# Altium PCB model_a.PcbDoc (part 1 of 2)
Units mm, origin at the board's own origin, x right, y up, seen from the top; angles counter-clockwise.
Board outline 65 x 56 mm, 6 copper layers (Top Layer, Ground 1, Supply, Layer 2, Ground 2, Bottom Layer), stack 1.597 mm thick; 97 components, 140 nets, 582 pads, 134 vias.
Unrouted connection lines stored in the file: 357.
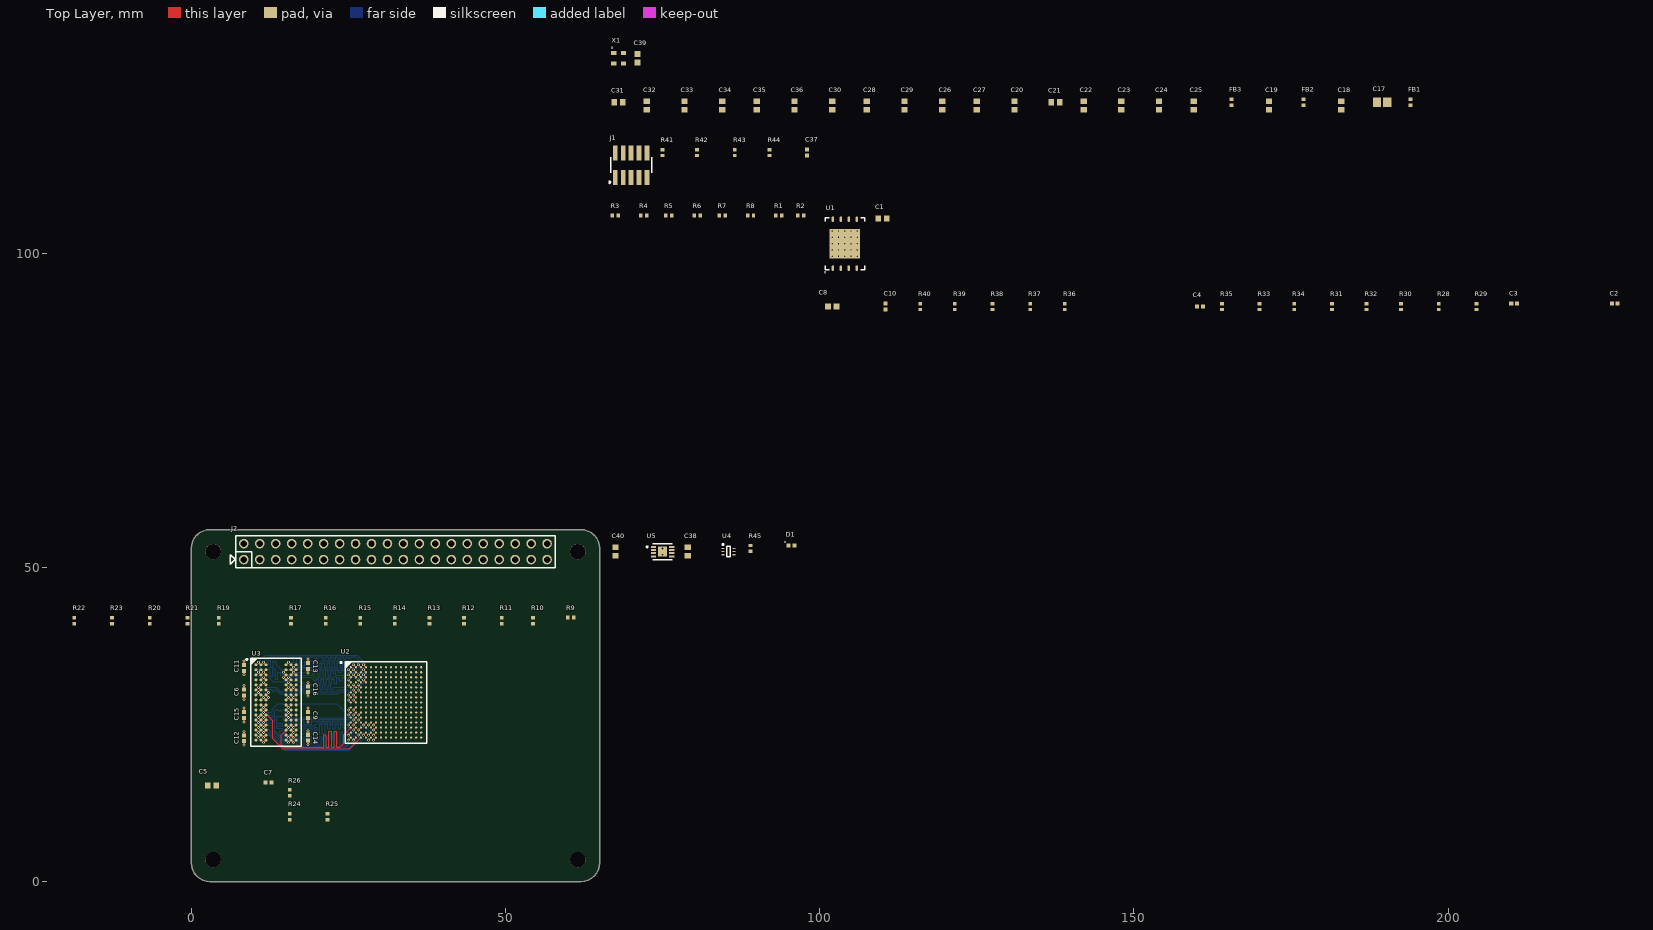
[diagram p0: Top Layer view]
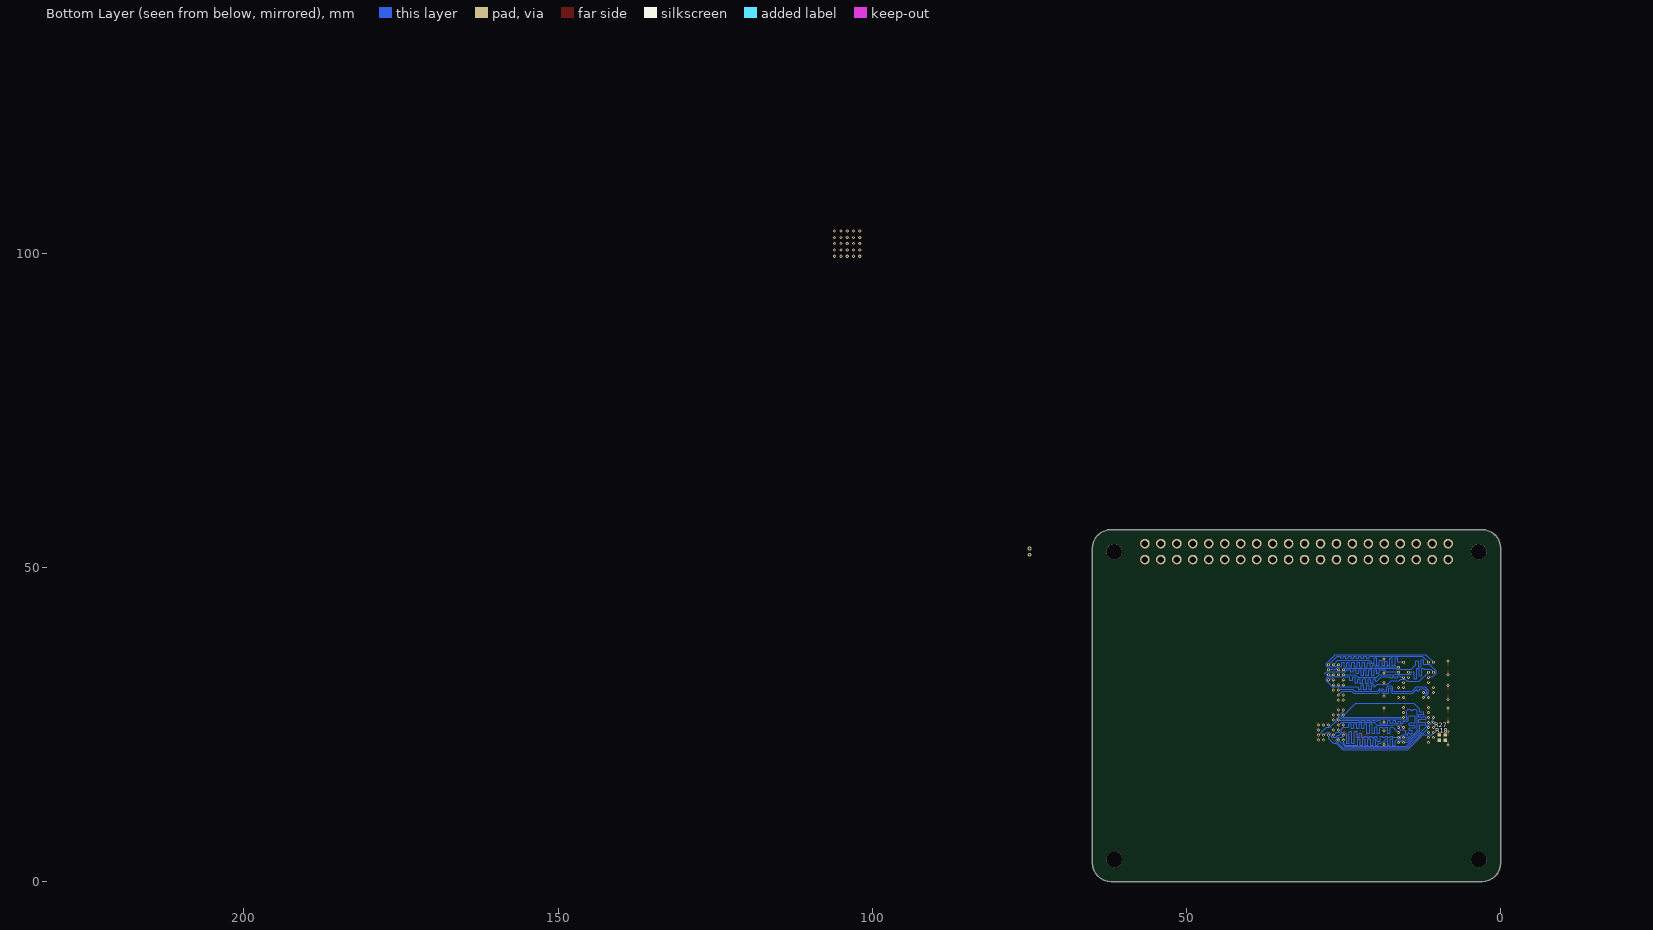
[diagram p1: Bottom Layer view, seen from below]
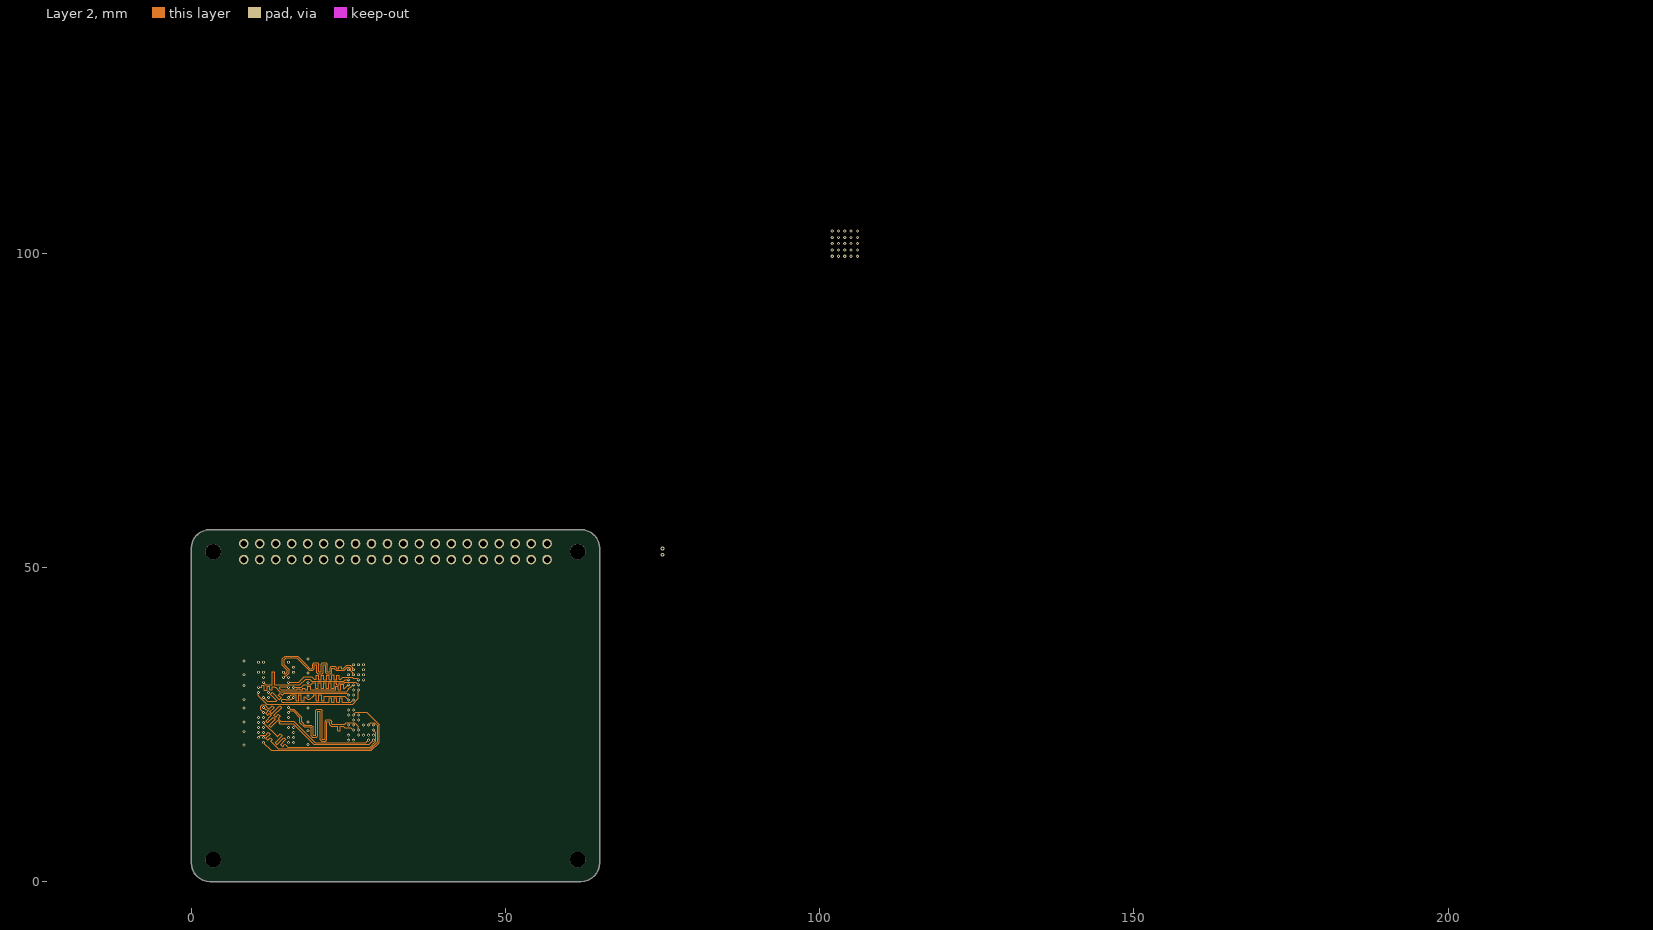
[diagram p2: Layer 2]

## Layer stack, top to bottom
Top Solder: solder mask 0.0203, SM-001, Dk 3.8
Top Layer: signal copper 0.035
Dielectric 4: prepreg 0.1, 2313, Dk 4.25
Ground 1: signal copper 0.0175
Dielectric 2: core 0.565, JLC2313, Dk 4.1
Supply: signal copper 0.0175
Dielectric 1: prepreg 0.127, 2116, Dk 4.05
Layer 2: signal copper 0.0175
Dielectric 3: core 0.565, JLC2313, Dk 4.1
Ground 2: signal copper 0.0175
Dielectric 5: prepreg 0.1, 2313, Dk 4.25
Bottom Layer: signal copper 0.035
Bottom Solder: solder mask 0.0203, SM-001, Dk 3.8

## Board outline
3,56 2.415,55.942 1.852,55.772 1.333,55.494 0.879,55.121 0.506,54.667 0.228,54.148 0.058,53.585 0,53 0,3 0.058,2.415 0.228,1.852 0.506,1.333 0.879,0.879 1.333,0.506 1.852,0.228 2.415,0.058 3,0 62,0 62.585,0.058 63.148,0.228 63.667,0.506 64.121,0.879 64.494,1.333 64.772,1.852 64.942,2.415 65,3 65,53 64.942,53.585 64.772,54.148 64.494,54.667 64.121,55.121 63.667,55.494 63.148,55.772 62.585,55.942 62,56

## Design rules (kind name [scope] priority, off if disabled: settings)
Clearance [All] p1: gap=0.089 ignorepadtopadclearanceinfootprint=FALSE
DiffPairsRouting DiffPairsRouting_DDR_D80 [InDifferentialPairClass('All Differential Pairs') and InNetClass('DDR_Z80')] p1: maxlimit=0.254 minlimit=0.089 mostfreqgap=0.127 toplayer_minwidth=0.089 toplayer_maxwidth=0.381 toplayer_prefwidth=0.174 midlayer1_minwidth=0.089 midlayer1_maxwidth=0.381 midlayer1_prefwidth=0.143 midlayer2_minwidth=0.089 midlayer2_maxwidth=0.381 midlayer2_prefwidth=0.175 midlayer3_minwidth=0.089 midlayer3_maxwidth=0.381 midlayer3_prefwidth=0.175 midlayer4_minwidth=0.089 midlayer4_maxwidth=0.381 midlayer4_prefwidth=0.143 bottomlayer_minwidth=0.089 bottomlayer_maxwidth=0.381 bottomlayer_prefwidth=0.174 impedanceprofiledriven=TRUE impedanceprofileid={D37B1282-675B-4CC8-9B69-EE9E0E3B6E0B} impedanceprofilevalue=80.000000 maxuncoupledlength=12.7
DiffPairsRouting [All] p2: maxlimit=0.254 minlimit=0.254 mostfreqgap=0.254 toplayer_minwidth=0.381 toplayer_maxwidth=0.381 toplayer_prefwidth=0.381 midlayer1_minwidth=0.381 midlayer1_maxwidth=0.381 midlayer1_prefwidth=0.381 midlayer2_minwidth=0.381 midlayer2_maxwidth=0.381 midlayer2_prefwidth=0.381 midlayer3_minwidth=0.381 midlayer3_maxwidth=0.381 midlayer3_prefwidth=0.381 midlayer4_minwidth=0.381 midlayer4_maxwidth=0.381 midlayer4_prefwidth=0.381 bottomlayer_minwidth=0.381 bottomlayer_maxwidth=0.381 bottomlayer_prefwidth=0.381 maxuncoupledlength=12.7
MatchedLengths MatchedLengths_DDR_CLOCKS_STROBES_1 [InxSignalClass('ADDR_PP1_1') OR InxSignalClass('DATA_BL0') OR InxSignalClass('DATA_BL1_1')] p1: tolerance=0.127 checknetsindiffpair=TRUE checkdiffpairvsdiffpair=FALSE checkxsignals=FALSE checkothers=FALSE
MatchedLengths MatchedLengths_DATA_BL1_1 [InxSignalClass('DATA_BL1_1')] p2: tolerance=0.381 checknetsindiffpair=FALSE checkdiffpairvsdiffpair=TRUE checkxsignals=TRUE checkothers=TRUE
MatchedLengths MatchedLengths_DATA_BL0_1 [InxSignalClass('DATA_BL0')] p3: tolerance=0.381 checknetsindiffpair=FALSE checkdiffpairvsdiffpair=TRUE checkxsignals=TRUE checkothers=TRUE
MatchedLengths MatchedLengths_ADDR_PP1_1 [InxSignalClass('ADDR_PP1_1')] p4: tolerance=1.27 checknetsindiffpair=FALSE checkdiffpairvsdiffpair=TRUE checkxsignals=TRUE checkothers=TRUE
MatchedLengths MatchedLengths_DDR_CLOCKS_STROBES [InxSignalClass('ADDR_PP1') OR InxSignalClass('DATA_BL0') OR InxSignalClass('DATA_BL1')] p5: tolerance=0.127 checknetsindiffpair=TRUE checkdiffpairvsdiffpair=FALSE checkxsignals=FALSE checkothers=FALSE
MatchedLengths MatchedLengths_DATA_BL1 [InxSignalClass('DATA_BL1')] p6: tolerance=0.381 checknetsindiffpair=FALSE checkdiffpairvsdiffpair=TRUE checkxsignals=TRUE checkothers=TRUE
MatchedLengths MatchedLengths_DATA_BL0 [InxSignalClass('DATA_BL0')] p7: tolerance=0.381 checknetsindiffpair=FALSE checkdiffpairvsdiffpair=TRUE checkxsignals=TRUE checkothers=TRUE
MatchedLengths MatchedLengths_ADDR_PP1 [InxSignalClass('ADDR_PP1')] p8: tolerance=1.27 checknetsindiffpair=FALSE checkdiffpairvsdiffpair=TRUE checkxsignals=TRUE checkothers=TRUE
MatchedLengths "Schematic Matched Net Lengths_2" [InNetClass('DDR_Z80')] p9: tolerance=0.127 checknetsindiffpair=TRUE checkdiffpairvsdiffpair=FALSE checkxsignals=FALSE checkothers=FALSE
MatchedLengths "Schematic Matched Net Lengths_1" [InNetClass('DDR_LANE_0')] p10: tolerance=25.4 checknetsindiffpair=FALSE checkdiffpairvsdiffpair=TRUE checkxsignals=TRUE checkothers=TRUE usedelayunits=TRUE delaytolerance=15.000000
MatchedLengths "Schematic Matched Net Lengths" [InNetClass('DDR_LANE_1')] p11: tolerance=0.381 checknetsindiffpair=FALSE checkdiffpairvsdiffpair=TRUE checkxsignals=TRUE checkothers=TRUE usedelayunits=TRUE delaytolerance=15.000000
PolygonConnect [All] p1: connectstyle=Relief reliefconductorwidth=0.254 reliefentries=4 polygonreliefangle="90 Angle" airgapwidth=0.254
RoomDefinition ZYNQ [InComponentClass('ZYNQ')] p1: confinementstyle=ConfineIn formatcopy=TRUE lockcomponents=FALSE outline 66.5,129 75,129 75,135.5 66.5,135.5
RoomDefinition FPGA_POWER [InComponentClass('FPGA_POWER')] p2: confinementstyle=ConfineIn formatcopy=TRUE lockcomponents=FALSE outline 66,121.5 198,121.5 198,128 66,128
RoomDefinition FPGA_MISC [InComponentClass('FPGA_MISC')] p3: confinementstyle=ConfineIn formatcopy=TRUE lockcomponents=FALSE outline 66,110.5 102.5,110.5 102.5,120 66,120
RoomDefinition FPGA_MIO [InComponentClass('FPGA_MIO')] p4: confinementstyle=ConfineIn formatcopy=TRUE lockcomponents=FALSE outline 66,96.5 112,96.5 112,109.5 66,109.5
RoomDefinition FPGA_DDR3L [InComponentClass('FPGA_DDR3L')] p5: confinementstyle=ConfineIn formatcopy=TRUE lockcomponents=FALSE outline 66,77 333.999,77 333.999,95.5 66,95.5
RoomDefinition FPGA_BANK34 [InComponentClass('FPGA_BANK34')] p6: confinementstyle=ConfineIn formatcopy=TRUE lockcomponents=FALSE outline 66,58 81.5,58 81.5,75.5 66,75.5
RoomDefinition connectors [InComponentClass('connectors')] p7: confinementstyle=ConfineIn formatcopy=TRUE lockcomponents=FALSE outline 66.5,2 104,2 104,57 66.5,57
RoutingTopology RoutingTopology_DDRAddressAndControls [InNetClass('DDR_AddressAndControls')] p1: topology=Daisy_Simple
RoutingTopology [All] p2: topology=Shortest
RoutingVias [All] p1: holewidth=0.2 width=0.46 viastyle="Through Hole" minholewidth=0.2 minwidth=0.46 maxholewidth=0.5 maxwidth=1
SolderMaskExpansion [All] p1: expansion=0.102 istentingtop=FALSE
Width Width_DDR_S40 [InNetClass('DDR_Z40')] p1: maxlimit=0.254 minlimit=0.089 preferedwidth=0.169 toplayer_prefwidth=0.158 midlayer1_prefwidth=0.128 midlayer4_prefwidth=0.128 bottomlayer_prefwidth=0.158 impedanceprofiledriven=TRUE impedanceprofileid={D11805BC-751B-4782-8DA5-E56B2B436CBE} impedanceprofilevalue=50.000000 minimp=50.000000 maximp=50.000000 favimp=50.000000
Width [All] p2: maxlimit=0.254 minlimit=0.089 preferedwidth=0.102
28 further rules are at their usual default settings.

## Classes and differential pairs
net class DDR_AddressAndControls: A0 A1 A2 A3 A4 A5 A6 A7 A8 A9 A10 A11 A12 A13 A14 BA0 BA1 BA2 CAS CK_N CK_P CS ODT RAS WE
net class GPIO[0..21]: GPIO0 GPIO1 GPIO2 GPIO3 GPIO4 GPIO5 GPIO6 GPIO7 GPIO8 GPIO9 GPIO10 GPIO11 GPIO12 GPIO13 GPIO14 GPIO15 GPIO16 GPIO17 GPIO18 GPIO19 GPIO20 GPIO21
net class DDR_Z80: CK_N CK_P DQS0_N DQS0_P DQS1_N DQS1_P
net class DDR_Z40: A0 A1 A2 A3 A4 A5 A6 A7 A8 A9 A10 A11 A12 A13 A14 BA0 BA1 BA2 CAS DM0 DM1 DQ0 DQ1 DQ2 DQ3 DQ4 DQ5 DQ6 DQ7 DQ8 DQ9 DQ10 DQ11 DQ12 DQ13 DQ14 DQ15 DRST ODT RAS WE
net class DDR_LANE_1: DM1 DQ8 DQ9 DQ10 DQ11 DQ12 DQ13 DQ14 DQ15 DQS1_N DQS1_P
net class DDR_LANE_0: DM0 DQ0 DQ1 DQ2 DQ3 DQ4 DQ5 DQ6 DQ7 DQS0_N DQS0_P
net class DDR_CTRL: A0 A1 A2 A3 A4 A5 A6 A7 A8 A9 A10 A11 A12 A13 A14 BA0 BA1 BA2 CAS CK_N CK_P DRST ODT RAS WE
component class ZYNQ: C39 X1
component class FPGA_POWER: C17 C18 C19 C20 C21 C22 C23 C24 C25 C26 C27 C28 C29 C30 C31 C32 C33 C34 C35 C36 FB1 FB2 FB3
component class FPGA_MISC: C37 J1 R41 R42 R43 R44
component class FPGA_MIO: C1 R1 R2 R3 R4 R5 R6 R7 R8 U1
component class FPGA_DDR3L: C2 C3 C4 C5 C6 C7 C8 C9 C10 C11 C12 C13 C14 C15 C16 R9 R10 R11 R12 R13 R14 R15 R16 R17 R18 R19 R20 R21 R22 R23 R24 R25 R26 R27 R28 R29 R30 R31 R32 R33 R34 R35 R36 R37 R38 R39 R40 U3
component class FPGA_BANK34: U2
component class connectors: C38 C40 D1 J2 R45 U4 U5
differential pair IO_L5: +IO_L5_P -IO_L5_N
differential pair IO_L3: +IO_L3_P -IO_L3_N
differential pair IO_L2: +IO_L2_P -IO_L2_N
differential pair IO_L1: +IO_L1_P -IO_L1_N
differential pair DQS1: +DQS1_P -DQS1_N
differential pair DQS0: +DQS0_P -DQS0_N
differential pair CK: +CK_P -CK_N

## Components (designator, comment, footprint, x,y, rotation, side; value= is the part's Value field where it differs from the comment)
C1 "cap" CAPC1608X08N 110,105.5 r0 top value=470n
C2 "cap" CAPC1005X06N 226.5,92 r0 top value=100n
C3 "cap" CAPC1005X06N 210.5,92 r0 top value=100n
C4 "cap" CAPC1005X06N 160.5,91.5 r0 top value=470n
C5 "cap" CAPC1608X08N 3.3,15.3 r0 top value=4u7
C6 "cap" CAPC1005X06N 8.4,30.1 r90 top value=470n
C7 "cap" CAPC1005X06N 12.3,15.8 r0 top value=100n
C8 "cap" CAPC1608X08N 102,91.5 r0 top value=4u7
C9 "cap" CAPC1005X06N 18.6,26.5 r90 top value=470n
C10 "cap" CAPC1005X06N 110.5,91.5 r90 top value=100n
C11 "cap" CAPC1005X06N 8.4,34 r90 top value=470n
C12 "cap" CAPC1005X06N 8.4,22.8 r90 top value=470n
C13 "cap" CAPC1005X06N 18.6,34.3 r90 top value=470n
C14 "cap" CAPC1005X06N 18.6,22.9 r90 top value=470n
C15 "cap" CAPC1005X06N 8.4,26.5 r90 top value=470n
C16 "cap" CAPC1005X06N 18.6,30.6 r90 top value=470n
C17 "cap" CAPC2012X11N 189.5,124 r0 top value=100n
C18 "cap" CAPC1608X08N 183,123.5 r90 top value=470n
C19 "cap" CAPC1608X08N 171.5,123.5 r90 top value=470n
C20 "cap" CAPC1608X08N 131,123.5 r90 top value=470n
C21 "cap" CAPC1608X08N 137.5,124 r0 top value=470n
C22 "cap" CAPC1608X08N 142,123.5 r90 top value=470n
C23 "cap" CAPC1608X08N 148,123.5 r90 top value=470n
C24 "cap" CAPC1608X08N 154,123.5 r90 top value=470n
C25 "cap" CAPC1608X08N 159.5,123.5 r90 top value=470n
C26 "cap" CAPC1608X08N 119.5,123.5 r90 top value=470n
C27 "cap" CAPC1608X08N 125,123.5 r90 top value=470n
C28 "cap" CAPC1608X08N 107.5,123.5 r90 top value=470n
C29 "cap" CAPC1608X08N 113.5,123.5 r90 top value=470n
C30 "cap" CAPC1608X08N 102,123.5 r90 top value=470n
C31 "cap" CAPC1608X08N 68,124 r0 top value=470n
C32 "cap" CAPC1608X08N 72.5,123.5 r90 top value=470n
C33 "cap" CAPC1608X08N 78.5,123.5 r90 top value=470n
C34 "cap" CAPC1608X08N 84.5,123.5 r90 top value=470n
C35 "cap" CAPC1608X08N 90,123.5 r90 top value=470n
C36 "cap" CAPC1608X08N 96,123.5 r90 top value=470n
C37 "cap" CAPC1005X06N 98,116 r90 top value=100n
C38 "cap" CAPC1608X08N 79,52.5 r90 top value=470n
C39 "cap" CAPC1608X08N 71,131 r90 top value=470n
C40 "cap" CAPC1608X08N 67.5,52.5 r90 top value=470n
D1 "led" CAPCP1005X06N 95.5,53.5 r0 top value=RED
FB1 "ferrite" INDC1005X06N 194,124 r90 top value=100R
FB2 "ferrite" INDC1005X06N 177,124 r90 top value=100R
FB3 "ferrite" INDC1005X06N 165.5,124 r90 top value=100R
J1 "SWD" hdr_2x5_50mil 70,114 r0 top
J2 "Raspberry PI" raspi_male_con 32.5,52.5 r0 top locked
R1 "res" RESC1005X04N 93.5,106 r0 top value=10K
R2 "res" RESC1005X04N 97,106 r0 top value=10K
R3 "res" RESC1005X04N 67.5,106 r0 top value=10K
R4 "res" RESC1005X04N 72,106 r0 top value=10K
R5 "res" RESC1005X04N 76,106 r0 top value=10K
R6 "res" RESC1005X04N 80.5,106 r0 top value=10K
R7 "res" RESC1005X04N 84.5,106 r0 top value=10K
R8 "res" RESC1005X04N 89,106 r0 top value=10K
R9 "res" RESC1005X04N 60.399,42 r0 top value=40R2
R10 "res" RESC1005X04N 54.399,41.5 r90 top value=40R2
R11 "res" RESC1005X04N 49.399,41.5 r90 top value=40R2
R12 "res" RESC1005X04N 43.399,41.5 r90 top value=40R2
R13 "res" RESC1005X04N 37.899,41.5 r90 top value=40R2
R14 "res" RESC1005X04N 32.399,41.5 r90 top value=40R2
R15 "res" RESC1005X04N 26.899,41.5 r90 top value=40R2
R16 "res" RESC1005X04N 21.399,41.5 r90 top value=40R2
R17 "res" RESC1005X04N 15.899,41.5 r90 top value=40R2
R18 "res" RESC1005X04N 9.3,22.5 r180 bottom value=40R2
R19 "res" RESC1005X04N 4.399,41.5 r90 top value=240R
R20 "res" RESC1005X04N -6.601,41.5 r90 top value=10K
R21 "res" RESC1005X04N -0.601,41.5 r90 top value=40R2
R22 "res" RESC1005X04N -18.601,41.5 r90 top value=10K
R23 "res" RESC1005X04N -12.601,41.5 r90 top value=40R2
R24 "res" RESC1005X04N 15.7,10.325 r90 top value=40R2
R25 "res" RESC1005X04N 21.7,10.325 r90 top value=40R2
R26 "res" RESC1005X04N 15.7,14.125 r90 top value=40R2
R27 "res" RESC1005X04N 9.3,23.4 r180 bottom value=40R2
R28 "res" RESC1005X04N 198.5,91.5 r90 top value=40R2
R29 "res" RESC1005X04N 204.5,91.5 r90 top value=40R2
R30 "res" RESC1005X04N 192.5,91.5 r90 top value=4K7
R31 "res" RESC1005X04N 181.5,91.5 r90 top value=40R2
R32 "res" RESC1005X04N 187,91.5 r90 top value=40R2
R33 "res" RESC1005X04N 170,91.5 r90 top value=4K7
R34 "res" RESC1005X04N 175.5,91.5 r90 top value=40R2
R35 "res" RESC1005X04N 164,91.5 r90 top value=4K7
R36 "res" RESC1005X04N 139,91.5 r90 top value=40R2
R37 "res" RESC1005X04N 133.5,91.5 r90 top value=40R2
R38 "res" RESC1005X04N 127.5,91.5 r90 top value=40R2
R39 "res" RESC1005X04N 121.5,91.5 r90 top value=80R6
R40 "res" RESC1005X04N 116,91.5 r90 top value=40R2
R41 "res" RESC1005X04N 75,116 r90 top value=10K
R42 "res" RESC1005X04N 80.5,116 r90 top value=10K
R43 "res" RESC1005X04N 86.5,116 r90 top value=10K
R44 "res" RESC1005X04N 92,116 r90 top value=10K
R45 "res" RESC1005X04N 89,53 r90 top value=10K
U1 "S25FL128SAGNFI001" SPSN-WSON-8_N 104,101.5 r90 top
U2 "XC7Z010-1CLG225I" CLG225 31,28.5 r0 top
U3 "MT41K256M16TW-107 XIT:P" MICT-TW-96 13.5,28.5 r0 top locked
U4 "TMP102AIDRLT" DRL0006A_L 85.5,52.5 r0 top
U5 "ATSHA204A-MAHDA-T" FP-C04-21355-Q4B-MFG 75,52.5 r0 top
X1 "DSC1001DI2" DFN165P200X90-4N_DSC1001DIx 68,131 r0 top

## Footprints (in the part's own frame and the unit in brackets; to place one, negate y for a bottom-side part, rotate by r counter-clockwise, add the part's x,y. Pads: shape width x height; smd on the part's side, far side on the other; paste and mask are expansions set on the pad)
CAPC1005X06N [mm] "Chip Capacitor, 2-Leads, Body 1.00x0.50mm, IPC Medium Density"
  rect 0.64x0.64 smd: 1(-0.46,0) 2(0.46,0)
  body extent -0.55,-0.3 0.55,0.3, height 0.6
CAPC1608X08N [mm] "Chip Capacitor, 2-Leads, Body 1.60x0.80mm, IPC Medium Density"
  rect 0.9x1 smd: 1(-0.675,0) 2(0.675,0)
  body extent -0.87,-0.48 0.87,0.48, height 0.85
CAPC2012X11N [mm] "Chip Capacitor, 2-Leads, Body 2.00x1.25mm, IPC Medium Density"
  rect 1.3x1.45 smd: 1(-0.8,0) 2(0.8,0)
  body extent -1.1,-0.72 1.1,0.72, height 1.1
CAPCP1005X06N [mm] "Chip Capacitor, 2-Leads, Body 1.00x0.50mm, IPC Medium Density"
  rect 0.64x0.64 smd: 1(-0.46,0) 2(0.46,0)
  silkscreen extent -1.04,0.48 -0.94,0.58, body extent -0.5,-0.25 0.5,0.25, height 0.5
CLG225 [mm] "BGA, 225-Balls, Body 13x13mm, Pitch 0.8mm"
  round 0.35 smd: A1(-5.6,5.6) A2(-4.8,5.6) A3(-4,5.6) A4(-3.2,5.6) A5(-2.4,5.6) A6(-1.6,5.6) A7(-0.8,5.6) A8(0,5.6) A9(0.8,5.6) A10(1.6,5.6) A11(2.4,5.6) A12(3.2,5.6) A13(4,5.6) A14(4.8,5.6) A15(5.6,5.6) B1(-5.6,4.8) B2(-4.8,4.8) B3(-4,4.8) B4(-3.2,4.8) B5(-2.4,4.8) B6(-1.6,4.8) B7(-0.8,4.8) B8(0,4.8) B9(0.8,4.8) B10(1.6,4.8) B11(2.4,4.8) B12(3.2,4.8) B13(4,4.8) B14(4.8,4.8) B15(5.6,4.8) C1(-5.6,4) C2(-4.8,4) C3(-4,4) C4(-3.2,4) C5(-2.4,4) C6(-1.6,4) C7(-0.8,4) C8(0,4) C9(0.8,4) C10(1.6,4) C11(2.4,4) C12(3.2,4) C13(4,4) C14(4.8,4) C15(5.6,4) D1(-5.6,3.2) D2(-4.8,3.2) D3(-4,3.2) D4(-3.2,3.2) D5(-2.4,3.2) D6(-1.6,3.2) D7(-0.8,3.2) D8(0,3.2) D9(0.8,3.2) D10(1.6,3.2) D11(2.4,3.2) D12(3.2,3.2) D13(4,3.2) D14(4.8,3.2) D15(5.6,3.2) E1(-5.6,2.4) E2(-4.8,2.4) E3(-4,2.4) E4(-3.2,2.4) E5(-2.4,2.4) E6(-1.6,2.4) E7(-0.8,2.4) E8(0,2.4) E9(0.8,2.4) E10(1.6,2.4) E11(2.4,2.4) E12(3.2,2.4) E13(4,2.4) E14(4.8,2.4) E15(5.6,2.4) F1(-5.6,1.6) F2(-4.8,1.6) F3(-4,1.6) F4(-3.2,1.6) F5(-2.4,1.6) F6(-1.6,1.6) F7(-0.8,1.6) F8(0,1.6) F9(0.8,1.6) F10(1.6,1.6) F11(2.4,1.6) F12(3.2,1.6) F13(4,1.6) F14(4.8,1.6) F15(5.6,1.6) G1(-5.6,0.8) G2(-4.8,0.8) G3(-4,0.8) G4(-3.2,0.8) G5(-2.4,0.8) G6(-1.6,0.8) G7(-0.8,0.8) G8(0,0.8) G9(0.8,0.8) G10(1.6,0.8) G11(2.4,0.8) G12(3.2,0.8) G13(4,0.8) G14(4.8,0.8) G15(5.6,0.8) H1(-5.6,0) H2(-4.8,0) H3(-4,0) H4(-3.2,0) H5(-2.4,0) H6(-1.6,0) H7(-0.8,0) H8(0,0) H9(0.8,0) H10(1.6,0) H11(2.4,0) H12(3.2,0) H13(4,0) H14(4.8,0) H15(5.6,0) J1(-5.6,-0.8) J2(-4.8,-0.8) J3(-4,-0.8) J4(-3.2,-0.8) J5(-2.4,-0.8) J6(-1.6,-0.8) J7(-0.8,-0.8) J8(0,-0.8) J9(0.8,-0.8) J10(1.6,-0.8) J11(2.4,-0.8) J12(3.2,-0.8) J13(4,-0.8) J14(4.8,-0.8) J15(5.6,-0.8) K1(-5.6,-1.6) K2(-4.8,-1.6) K3(-4,-1.6) K4(-3.2,-1.6) K5(-2.4,-1.6) K6(-1.6,-1.6) K7(-0.8,-1.6) K8(0,-1.6) K9(0.8,-1.6) K10(1.6,-1.6) K11(2.4,-1.6) K12(3.2,-1.6) K13(4,-1.6) K14(4.8,-1.6) K15(5.6,-1.6) L1(-5.6,-2.4) L2(-4.8,-2.4) L3(-4,-2.4) L4(-3.2,-2.4) L5(-2.4,-2.4) L6(-1.6,-2.4) L7(-0.8,-2.4) L8(0,-2.4) L9(0.8,-2.4) L10(1.6,-2.4) L11(2.4,-2.4) L12(3.2,-2.4) L13(4,-2.4) L14(4.8,-2.4) L15(5.6,-2.4) M1(-5.6,-3.2) M2(-4.8,-3.2) M3(-4,-3.2) M4(-3.2,-3.2) M5(-2.4,-3.2) M6(-1.6,-3.2) M7(-0.8,-3.2) M8(0,-3.2) M9(0.8,-3.2) M10(1.6,-3.2) M11(2.4,-3.2) M12(3.2,-3.2) M13(4,-3.2) M14(4.8,-3.2) M15(5.6,-3.2) N1(-5.6,-4) N2(-4.8,-4) N3(-4,-4) N4(-3.2,-4) N5(-2.4,-4) N6(-1.6,-4) N7(-0.8,-4) N8(0,-4) N9(0.8,-4) N10(1.6,-4) N11(2.4,-4) N12(3.2,-4) N13(4,-4) N14(4.8,-4) N15(5.6,-4) P1(-5.6,-4.8) P2(-4.8,-4.8) P3(-4,-4.8) P4(-3.2,-4.8) P5(-2.4,-4.8) P6(-1.6,-4.8) P7(-0.8,-4.8) P8(0,-4.8) P9(0.8,-4.8) P10(1.6,-4.8) P11(2.4,-4.8) P12(3.2,-4.8) P13(4,-4.8) P14(4.8,-4.8) P15(5.6,-4.8) R1(-5.6,-5.6) R2(-4.8,-5.6) R3(-4,-5.6) R4(-3.2,-5.6) R5(-2.4,-5.6) R6(-1.6,-5.6) R7(-0.8,-5.6) R8(0,-5.6) R9(0.8,-5.6) R10(1.6,-5.6) R11(2.4,-5.6) R12(3.2,-5.6) R13(4,-5.6) R14(4.8,-5.6) R15(5.6,-5.6)
  silkscreen extent -7.27,-6.5 6.5,6.5, body extent -6.5,-6.5 6.5,6.5, height 1.5
DFN165P200X90-4N_DSC1001DIx [mm] "DFN, 4-Leads, Body 2.50x2.00mm, Pitch 1.65mm, IPC Medium Density"
  rect 0.85x0.65 smd: 1(-0.775,0.825) 2(-0.775,-0.825) 3(0.775,-0.825) 4(0.775,0.825)
  silkscreen extent -1.07,1.63 -0.97,1.72, body extent -1.02,-1.27 1.02,1.27, height 0.9
DRL0006A_L [mm] "SOT23, 6-Leads, Body 1.7x1.3mm, Pitch 0.5mm, IPC High Density"
  rrect50% 0.45x0.2 smd: 1(-0.875,0.5) 2(-0.875,0) 3(-0.875,-0.5) 4(0.875,-0.5) 5(0.875,0) 6(0.875,0.5)
  silkscreen extent -1,-0.85 0.25,1.27, body extent -0.65,-0.85 0.65,0.85, height 0.6
FP-C04-21355-Q4B-MFG [mm]
  rect 0.85x0.3 smd paste+0 mask+0: 1(-1.45,0.75) 2(-1.45,0.25) 3(-1.45,-0.25) 4(-1.45,-0.75) 5(1.45,-0.75) 6(1.45,-0.25) 7(1.45,0.25) 8(1.45,0.75)
  rect 1.4x1.6 smd paste+0 mask+0: 9(0,0)
  silkscreen extent -2.57,-1.27 1.55,1.27, body extent -1.97,-1.15 1.97,1.15, height 0.25
hdr_2x5_50mil [mm] "2x5 Pin header, 50mil pitch"
  rect 0.76x2.4 smd: 1(-2.54,-1.95) 2(-2.54,1.95) 2(-2.54,1.95) 3(-1.27,-1.95) 4(-1.27,1.95) 5(0,-1.95) 6(0,1.95) 7(1.27,-1.95) 8(1.27,1.95) 9(2.54,-1.95) 10(2.54,1.95)
  silkscreen extent -3.5,-3 3.25,1.25, body extent -3.17,-2.75 3.18,2.75, height 4.5
INDC1005X06N [mm] "Chip Inductor, 2-Leads, Body 1.00x0.50mm, IPC Medium Density"
  rect 0.58x0.64 smd: 1(-0.49,0) 2(0.49,0)
  body extent -0.55,-0.3 0.55,0.3, height 0.6
MICT-TW-96 [mm] "BGA, 96-Balls, Body 8x14mm, Pitch 0.8mm"
  round 0.47 smd mask-0.025: A1(-3.2,6) A2(-2.4,6) A3(-1.6,6) A7(1.6,6) A8(2.4,6) A9(3.2,6) B1(-3.2,5.2) B2(-2.4,5.2) B3(-1.6,5.2) B7(1.6,5.2) B8(2.4,5.2) B9(3.2,5.2) C1(-3.2,4.4) C2(-2.4,4.4) C3(-1.6,4.4) C7(1.6,4.4) C8(2.4,4.4) C9(3.2,4.4) D1(-3.2,3.6) D2(-2.4,3.6) D3(-1.6,3.6) D7(1.6,3.6) D8(2.4,3.6) D9(3.2,3.6) E1(-3.2,2.8) E2(-2.4,2.8) E3(-1.6,2.8) E7(1.6,2.8) E8(2.4,2.8) E9(3.2,2.8) F1(-3.2,2) F2(-2.4,2) F3(-1.6,2) F7(1.6,2) F8(2.4,2) F9(3.2,2) G1(-3.2,1.2) G2(-2.4,1.2) G3(-1.6,1.2) G7(1.6,1.2) G8(2.4,1.2) G9(3.2,1.2) H1(-3.2,0.4) H2(-2.4,0.4) H3(-1.6,0.4) H7(1.6,0.4) H8(2.4,0.4) H9(3.2,0.4) J1(-3.2,-0.4) J2(-2.4,-0.4) J3(-1.6,-0.4) J7(1.6,-0.4) J8(2.4,-0.4) J9(3.2,-0.4) K1(-3.2,-1.2) K2(-2.4,-1.2) K3(-1.6,-1.2) K7(1.6,-1.2) K8(2.4,-1.2) K9(3.2,-1.2) L1(-3.2,-2) L2(-2.4,-2) L3(-1.6,-2) L7(1.6,-2) L8(2.4,-2) L9(3.2,-2) M1(-3.2,-2.8) M2(-2.4,-2.8) M3(-1.6,-2.8) M7(1.6,-2.8) M8(2.4,-2.8) M9(3.2,-2.8) N1(-3.2,-3.6) N2(-2.4,-3.6) N3(-1.6,-3.6) N7(1.6,-3.6) N8(2.4,-3.6) N9(3.2,-3.6) P1(-3.2,-4.4) P2(-2.4,-4.4) P3(-1.6,-4.4) P7(1.6,-4.4) P8(2.4,-4.4) P9(3.2,-4.4) R1(-3.2,-5.2) R2(-2.4,-5.2) R3(-1.6,-5.2) R7(1.6,-5.2) R8(2.4,-5.2) R9(3.2,-5.2) T1(-3.2,-6) T2(-2.4,-6) T3(-1.6,-6) T7(1.6,-6) T8(2.4,-6) T9(3.2,-6)
  silkscreen extent -4.77,-7 4,7, body extent -4,-7 4,7, height 1.2
raspi_male_con [mil]
  round 60 hole 40: 1(-950,-50) 2(-950,50) 3(-850,-50) 4(-850,50) 5(-750,-50) 6(-750,50) 7(-650,-50) 8(-650,50) 9(-550,-50) 10(-550,50) 11(-450,-50) 12(-450,50) 13(-350,-50) 14(-350,50) 15(-250,-50) 16(-250,50) 17(-150,-50) 18(-150,50) 19(-50,-50) 20(-50,50) 21(50,-50) 22(50,50) 23(150,-50) 24(150,50) 25(250,-50) 26(250,50) 27(350,-50) 28(350,50) 29(450,-50) 30(450,50) 31(550,-50) 32(550,50) 33(650,-50) 34(650,50) 35(750,-50) 36(750,50) 37(850,-50) 38(850,50) 39(950,-50) 40(950,50)
  silkscreen extent -1033,-100 1000,100, body extent -1000,-100 1000,100, height 330
RESC1005X04N [mm] "Chip Resistor, 2-Leads, Body 1.05x0.54mm, IPC Medium Density"
  rect 0.55x0.6 smd: 1(-0.475,0) 2(0.475,0)
  body extent -0.55,-0.3 0.55,0.3, height 0.4
SPSN-WSON-8_N [mm] "SON, 8-Leads, Body 6.00x8.00mm, Pitch 1.27mm, Thermal Pad 4.80x4.65mm, IPC Medium Density"
  oval 0.9x0.4 smd: 1(-3.89,1.905) 2(-3.89,0.635) 3(-3.89,-0.635) 4(-3.89,-1.905) 5(3.89,-1.905) 6(3.89,-0.635) 7(3.89,0.635) 8(3.89,1.905)
  rect 4.65x4.8 smd paste-3: 9(0,0)
  silkscreen extent -4.6,-3.15 4.15,3.2, body extent -4,-3 4,3, height 0.8

## Part data
C1 C2 C3 C4 C5 C6 C7 C8 C9 C10 C11 C12 C13 C14 C15 C16 C17 C18 C19 C20 C21 C22 C23 C24 C25 C26 C27 C28 C29 C30 C31 C32 C33 C34 C35 C36 C37 C38 C39 C40: "Capacitor"
D1: "LED"
FB1 FB2 FB3: "Inductor"
J1: library part hdr_swd, "SWD Header"
J2: library part raspberry_2x20_con, "Raspberry PI 2x20 connector"
R1 R2 R3 R4 R5 R6 R7 R8 R9 R10 R11 R12 R13 R14 R15 R16 R17 R18 R19 R20 R21 R22 R23 R24 R25 R26 R27 R28 R29 R30 R31 R32 R33 R34 R35 R36 R37 R38 R39 R40 R41 R42 R43 R44 R45: "Resistor"
U1: library part CMP-1329-00028-1, "MirrorBit Flash Non-Volatile Memory CMOS 3.0 Volt Core with Versatile I/O, Serial Peripheral Interface with Multi-I/O, 128 Mbit, 133 MHz, -40 to 85 degC, 8-Pin WSON (WNG008), RoHS, Tube", Manufacturer=Spansion, Temperature Range="-40 to 85 degC", ComponentLink1Description="Manufacturer URL", ComponentLink1URL=http://www.spansion.com/Pages/Default.aspx, ComponentLink2Description=Datasheet, ComponentLink2URL=http://www.spansion.com/Support/Datasheets/S25FL128S_256S_00.pdf, ComponentLink3Description="Package Specification", ComponentLink3URL=http://www.spansion.com/Support/Datasheets/S25FL128S_256S_00.pdf, DatasheetVersion="Rev. 08", Density="128 Mbit", Mounting Technology="Surface Mount", OTP="1024 B", PackageDescription="8-Pin Plastic Small Outline, Body 6 x 8 mm, Pitch 1.27 mm", Packing=Tube, PartNumber=S25FL128SAGNFI001, RoHS=TRUE, Speed="133 MHz", VCC="2.7 to 3.6 V"
U2: library part CMP-0382-00001-1, "667 MHz Zynq™-7000 AP SoC, 88 PS I/O, 54 FPGA I/O, 225-Ball BGA, Speed Grade 1, Industrial Grade, Pb-Free", Generic Part Number=XC7Z010, Code_JEDEC=MO-275-HHAC-1, ComponentLink1Description=Datasheet, ComponentLink1URL=http://www.xilinx.com/support/documentation/data_sheets/ds190-Zynq-7000-Overview.pdf, ComponentLink2Description="Package Specification", ComponentLink2URL=http://www.xilinx.com/support/documentation/user_guides/ug865-Zynq-7000-Pkg-Pinout.pdf, ComponentLink3Description="DC and AC Switching Characteristics", ComponentLink3URL=http://www.xilinx.com/support/documentation/data_sheets/ds187-XC7Z010-XC7Z020-Data-Sheet.pdf, ComponentLink4Description="Package File", ComponentLink4URL=http://www.xilinx.com/support/packagefiles/z7packages/xc7z010clg225pkg.txt, ComponentLink5Description="Packaging and Pinout", ComponentLink5URL=http://www.xilinx.com/support/documentation/user_guides/ug865-Zynq-7000-Pkg-Pinout.pdf, ComponentLink6Description="PCB and Layout Guide", ComponentLink6URL=http://www.xilinx.com/support/documentation/user_guides/ug483_7Series_PCB.pdf, DatasheetVersion=v1.2, Extensible Block RAM (# 36Kb Blocks)="240 KB (60)", Flip Flops=35200, LUTs=17600, Mounting Technology="Surface Mount", PackageDescription="Wire-Bond Chip-Scale BGA, Body 13 x 13 mm, 0.8 mm Pitch", PackageReference=CLG225, PackageVersion="Rev 1.2, 02/2013", PartNumber=XC7Z010-1CLG225I, RoHS=Pb-Free, Speed Grade=-1
U3: library part CMP-2000-07474-1, "DDR3L SDRAM, 4 GB, 933 MHz, 1.283 to 1.45 V, -40 to 95 degC, 96-Pin FBGA, RoHs, Tray", Case\/Package=TFBGA, Frequency=933MHz, Manufacturer=Micron, Max Operating Temperature=95degC, Min Operating Temperature=-40degC, Package Description="96-Ball Fine Pitch Ball Grid Array, Body 14 x 8 mm, Pitch 0.8 mm", Package Reference=TW-96, Access Time=1.07ns, Address Bus Width=15b, Contact Plating=Silver, Data Bus Width=16b, Datasheet URL=https://www.micron.com/~/media/documents/products/data-sheet/dram/ddr3/4gb_1_35v_ddr3l_xit_addendum.pdf, Datasheet Version="Rev. A, 02/2016", Density=4Gb, Interface=Parallel, Manufacturer URL=http://www.micron.com/, Max Frequency=933MHz, Memory Type=RAM, Mount=SurfaceMount, Mounting Technology=SurfaceMount, Packaging=Tray, RoHSCompliant=true
U4: library part CMP-1685-00013-1, "Low Power Digital Temperature Sensor with SMBus and Two-Wire Serial Interface, 1.4 to 3.6 V, -40 to 125 degC, 6-Pin SOT (DRL), Green (RoHS & no Sb/Br), Tape and Reel", Address=0x90, ComponentLink1Description="Manufacturer URL", ComponentLink1URL=http://www.ti.com/, ComponentLink2Description=Datasheet, ComponentLink2URL=http://www.ti.com/lit/ds/symlink/tmp102.pdf, ComponentLink3Description="Package Specification", ComponentLink3URL=http://www.ti.com/lit/ml/mpds159c/mpds159c.pdf, DatasheetVersion="SBOS397F, 12/2015", PackageDescription="6-Pin Plastic Small Outline, Body 1.6 x 1.2 mm, Pitch 0.5 mm", PackageReference=DRL0006A, PackageVersion="4205622-3/D, 08/2207"
U5: library part CMP-06260-000005-1, "IC AUTHENTICATION CHIP 8UDFN", Ambient Temperature Range High=+85°C, Ambient Temperature Range Low=-40°C, Manufacturer="Microchip Technology", Package=C04-21355-Q4B, Temperature="-40°C to +85°C", Automotive=No, Category=IC, ComponentLink2Description=Datasheet, ComponentLink2URL=http://ww1.microchip.com/downloads/en/DeviceDoc/ATSHA204A-Data-Sheet-40002025A.pdf, Device Class L1="Integrated Circuits (ICs)", Device Class L2=unset, Device Class L3=unset, Digikey Description="IC AUTHENTICATION CHIP 8UDFN", Height=0.6mm, Lead Free=Yes, Manufacturer Part Number=ATSHA204A-MAHDA-T, Octopart=https://octopart.com/atsha204a-mahda-t-microchip-77761815, RoHS=TRUE, Standoff Height=0mm, Temperature Range High=+85°C, Temperature Range Low=-40°C
X1: library part dsc1001dix, "1.8V-3.3V Low-Power Precision CMOS Oscillators", Frequency="33.333 MHz"

## Free pads (board coordinates)
  round 2.5 hole 2.5 unplated mask+1.75: 1(3.5,3.5) 1(3.5,52.5) 1(61.5,3.5) 1(61.5,52.5)

## Via types
v1: diameter 0.46, hole 0.2, Top Layer to Bottom Layer, tented both sides, 107 vias
v2: diameter 0.5, hole 0.2, Top Layer to Bottom Layer, 25 vias
v3: diameter 0.6, hole 0.3, Top Layer to Bottom Layer, 2 vias

## Nets (pads, with @x,y where several pads share a name; then routed paths per layer and width w, separated by ;. In a path a pad name is that pad's centre, name@x,y a point inside that pad or via, vN(x,y) a via of type N, cw(c..) or ccw(c..) an arc to the next point about the centre after c; other vN are vias at no path point)
\I2C_INT: J2.7 U2.B5 U4.3
\QSPI_CS: R2.1 U1.1 U2.A5
A0: R9.1 U2.P1 U3.N3 | length 19.5
  Top Layer w0.158: v1(11.5,24.5) U3.N3@11.9,24.9 ; v1(25,23.294) 25,23.297 25.4,23.697 U2.P1@25.4,23.7
  Bottom Layer w0.158: v1(11.5,24.5) 12.453,23.547 12.602,23.547 14.938,21.211 25.062,21.211 25.998,22.147 26.01,22.147 26.198,22.335 26.198,22.665 25.945,22.919 25.375,22.919 v1(25,23.294)
A1: R10.1 U2.N1 U3.P7 | length 30.2
  Top Layer w0.158: U3.P7@15.1,24.1 14.3,23.3 14.3,21.8 14.753,21.347 19.8,21.347 21.094,21.347 21.094,23.334 21.506,23.334 21.506,21.347 21.919,21.347 21.919,23.887 22.331,23.887 22.331,21.347 22.743,21.347 22.743,23.887 23.156,23.887 23.156,21.347 23.647,21.347 24.3,22 24.3,23.4 25,24.1 U2.N1@25.4,24.5
A2: R11.1 U2.M1 U3.P3 | length 1.1
  Top Layer w0.158: v1(11.5,23.703) v1(11.5,23.703) 11.898,24.1 U3.P3@11.9,24.1 ; v1(25,24.9) U2.M1@25.4,25.3
A3: R12.1 U2.M4 U3.N2 | length 1.1
  Top Layer w0.158: v1(10.7,24.5) U3.N2@11.1,24.9 ; v1(27.4,24.9) U2.M4@27.8,25.3
A4: R13.1 U2.P3 U3.P8 | length 26.8
  Top Layer w0.158: U3.P8@15.9,24.1 U3.P8@15.9,24.1 v1(16.3,23.703) v1(16.3,23.703) ; v1(26.6,23.303) 26.602,23.303 26.998,23.7 U2.P3@27,23.7
  Bottom Layer w0.158: v1(16.3,23.703) 17.095,24.498 17.174,24.498 17.174,24.507 17.587,24.507 17.587,23.552 17.999,23.552 17.999,24.507 18.411,24.507 18.411,24.398 18.824,24.398 18.824,24.507 19.236,24.507 19.236,23.552 19.649,23.552 19.649,24.522 20.061,24.522 20.061,23.552 20.473,23.552 20.473,25.051 20.886,25.051 20.886,23.552 21.298,23.552 21.298,25.051 21.71,25.051 21.71,24.31 22.123,24.31 22.123,25.051 22.535,25.051 22.535,24.347 22.948,24.347 22.948,25.051 23.36,25.051 23.36,24.347 23.772,24.347 23.772,25.051 24.185,25.051 24.185,24.498 24.597,24.498 25.165,24.498 25.402,24.261 25.402,23.935 25.669,23.668 26.235,23.668 v1(26.6,23.303)
A5: R14.1 U2.P4 U3.P2 | length 20.3
  Top Layer w0.158: v1(10.7,23.7) U3.P2@11.1,24.1 ; v1(27.4,23.3) U2.P4@27.8,23.7
  Bottom Layer w0.158: v1(10.7,23.7) 11.1,23.3 12.5,23.3 14.9,20.9 25.1,20.9 26.1,21.9 26.566,21.9 27.4,22.734 v1(27.4,23.3)